# Altium PCB PCB1.PcbDoc
Units mm, origin at the board's own origin, x right, y up, seen from the top; angles counter-clockwise.
Board outline 17.85 x 10.65 mm, 2 copper layers (Top Layer, Bottom Layer); 9 components, 5 nets, 19 pads, 0 vias.
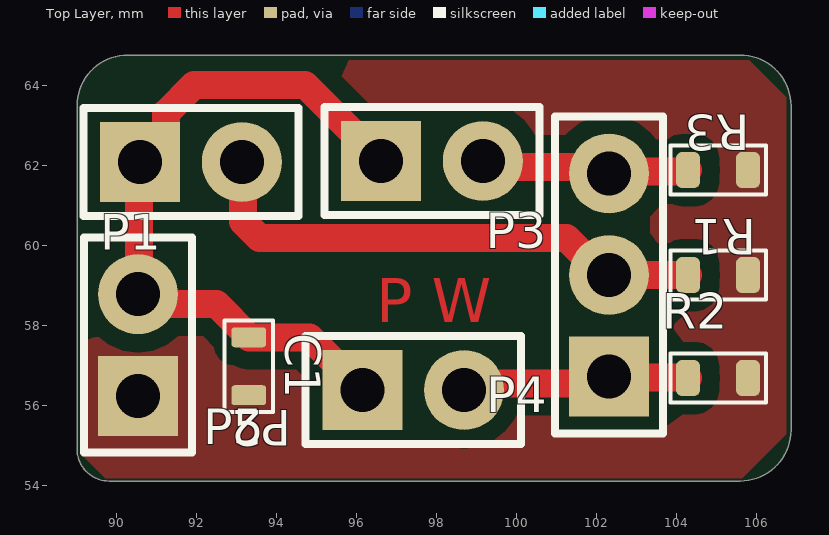
[diagram p0: Top Layer view]
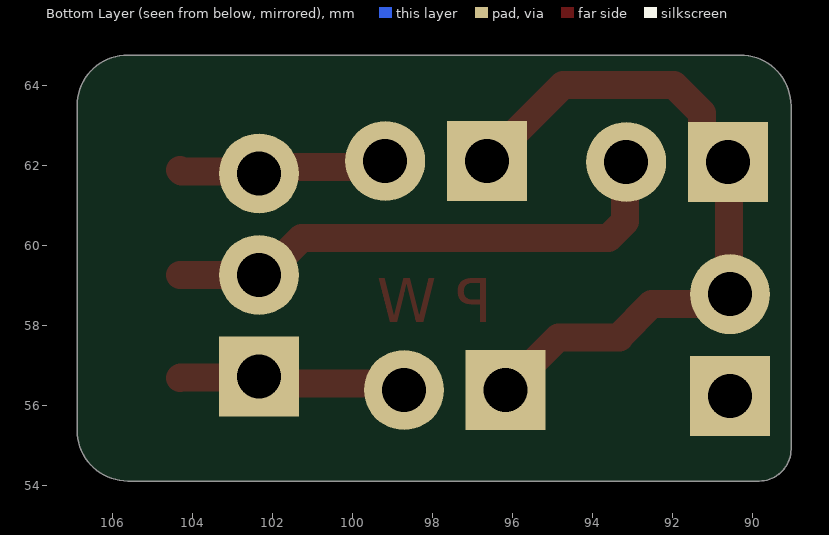
[diagram p1: Bottom Layer view, seen from below]
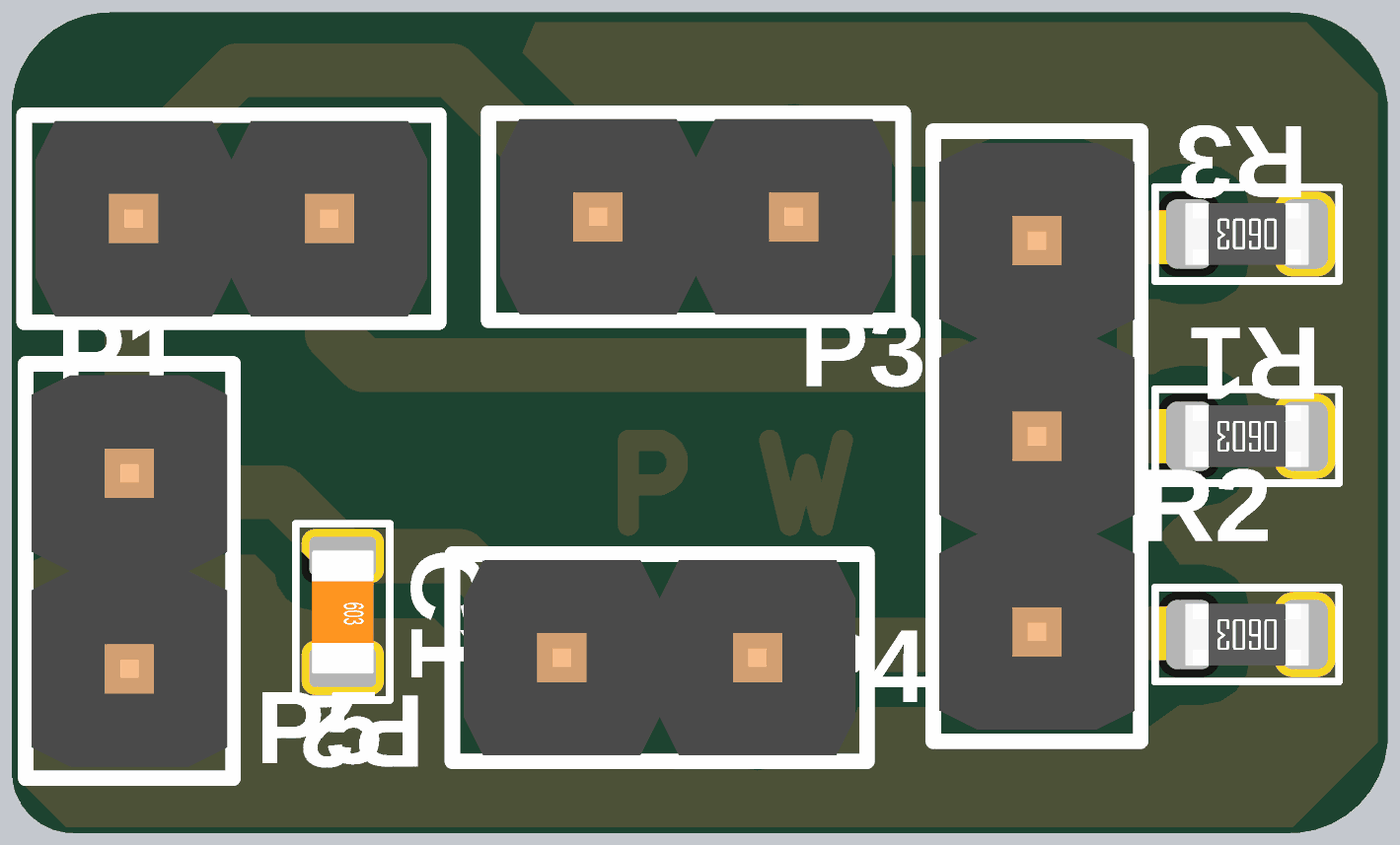
[diagram p2: 3D render of the assembled board from above, using the file's embedded part models]

## Layer stack, top to bottom
Top Solder: solder mask 0.0102, Solder Resist, Dk 3.5
Top Layer: signal copper 0.0356
Dielectric 1: dielectric 0.32, FR-4, Dk 4.8
Bottom Layer: signal copper 0.0356
Bottom Solder: solder mask 0.0102, Solder Resist, Dk 3.5

## Board outline
89.025,54.9 ccw(c89.825,54.9) 89.825,54.1 105.605,54.1 ccw(c105.605,55.37) 106.875,55.37 106.875,63.48 ccw(c105.605,63.48) 105.605,64.75 90.295,64.75 ccw(c90.295,63.48) 89.025,63.48

## Design rules (kind name [scope] priority, off if disabled: settings)
Clearance [All] p1: gap=0.45 ignorepadtopadclearanceinfootprint=FALSE
PlaneConnect [All] p1: planeconnectstyle=Direct reliefexpansion=0.508 reliefentries=4 reliefconductorwidth=0.254 reliefairgap=0.254
PolygonConnect [All] p1: connectstyle=Direct reliefconductorwidth=0.254 reliefentries=4 polygonreliefangle="90 Angle" airgapwidth=0.254
RoutingVias [All] p1: holewidth=0.711 width=1.27 viastyle="Through Hole" minholewidth=0.711 minwidth=1.27 maxholewidth=0.711 maxwidth=1.27
SolderMaskExpansion [All] p1: expansion=0.102 istentingtop=FALSE
Width [All] p1: maxlimit=2 minlimit=0.45 preferedwidth=1
29 further rules are at their usual default settings.

## Components (designator, comment, footprint, x,y, rotation, side; value= is the part's Value field where it differs from the comment)
C1 "" C_0603 93.318,56.969 r270 top
P1 "61300211121" 61300211121 91.875,62.075 r0 top
P2 "61300211121" 61300211121 97.43,56.375 r0 top
P3 "61300211121" 61300211121 97.9,62.1 r0 top
P4 "61300311121" 61300311121 102.325,59.25 r90 top
P5 "61300211121" 61300211121 90.55,57.5 r90 top
R1 "1kΩ" R_0603 105.05,59.25 r180 top
R2 "1kΩ" R_0603 105.05,56.675 r180 top
R3 "1kΩ" R_0603 105.05,61.875 r180 top

## Footprints (in the part's own frame and the unit in brackets; to place one, negate y for a bottom-side part, rotate by r counter-clockwise, add the part's x,y. Pads: shape width x height; smd on the part's side, far side on the other; paste and mask are expansions set on the pad)
61300211121 [mm] "Pin Header, pitch 2.54 mm, THT, Vertical, single row, 2p"
  rect 2x2 hole 1.1: 1(-1.27,0)
  round 2 hole 1.1: 2(1.27,0)
  silkscreen extent -2.69,-1.35 2.69,1.35, body extent -2.54,-1.27 2.54,1.27, height 8.57
61300311121 [mm] "Pin Header, pitch 2.54 mm, THT, Vertical, single row, 3p"
  rect 2x2 hole 1.1: 1(-2.54,0)
  round 2 hole 1.1: 2(0,0) 3(2.54,0)
  silkscreen extent -3.96,-1.35 3.96,1.35, body extent -3.81,-1.27 3.81,1.27, height 8.57
C_0603 [mm] "Chip Capacitor; Body 1.6 x 0.8 mm (LxW typ)"
  rrect30% 0.5x0.864 smd: 1(-0.725,0) 2(0.725,0)
  silkscreen extent -1.14,-0.61 1.14,0.61, body extent -0.8,-0.4 0.8,0.4, height 0.29
R_0603 [mm]
  rrect50% 0.6x0.9 smd: 1(-0.75,0) 2(0.75,0)
  silkscreen extent -1.19,-0.61 1.19,0.61, body extent -0.8,-0.4 0.8,0.4, height 0.45

## Part data
C1: library part Capacitor_0603, "MLCC - SMD/SMT Capacitor 50V", Package=0603, Voltage=50V, Price=None
P1 P2 P3 P5: "WR-PHD Pin Header, THT, pitch 2.54mm, Single Row, Vertical, 2p", Contact Resistance=20mOhm, Manufacturer="Wurth Elektronik", Operating Temperature="-40 to +105degC", Rated Current=3A, Withstanding Voltage=500VAC, Working Voltage=250VAC, ComponentLink1Description=Manufacturer, ComponentLink1URL=http://www.we-online.de, ComponentLink2Description=Datasheet, ComponentLink2URL=https://www.we-online.com/catalog/datasheet/61300211121.pdf, Gender="Pin Header", Manufacturer Part Number=61300211121, Mounting Technology=THT, Orientation=Vertical, Packaging=Bag, Pin Number=2, Pitch=2.54mm, Published Date="May 2020", Row Number=Single
P4: "WR-PHD Pin Header, THT, pitch 2.54mm, Single Row, Vertical, 3p", Contact Resistance=20mOhm, Manufacturer="Wurth Elektronik", Operating Temperature="-40 to +105degC", Rated Current=3A, Withstanding Voltage=500VAC, Working Voltage=250VAC, ComponentLink1Description=Manufacturer, ComponentLink1URL=http://www.we-online.de, ComponentLink2Description=Datasheet, ComponentLink2URL=https://www.we-online.com/catalog/datasheet/61300311121.pdf, Gender="Pin Header", Manufacturer Part Number=61300311121, Mounting Technology=THT, Orientation=Vertical, Packaging=Bag, Pin Number=3, Pitch=2.54mm, Published Date="May 2020", Row Number=Single
R1 R2 R3: library part Resistor_0603, "SMT Resistor"

## Nets (pads, with @x,y where several pads share a name; then routed paths per layer and width w, separated by ;. In a path a pad name is that pad's centre, name@x,y a point inside that pad or via, vN(x,y) a via of type N, cw(c..) or ccw(c..) an arc to the next point about the centre after c; other vN are vias at no path point)
ADC1: P1.2 P4.2 R1.2 | length 13.2
  Top Layer w0.7: P1.2 93.175,62.045 93.175,60.585 93.585,60.175 101.265,60.175 102.19,59.25 R1.2
ADC2: P2.2 P4.1 R2.2 | length 5.8
  Top Layer w0.7: P2.2 98.868,56.543 102.157,56.543 P4.1 102.342,56.693 104.282,56.693 R2.2
ADC3: P3.2 P4.3 R3.2 | length 5.3
  Top Layer w0.7: P3.2 99.325,61.945 102.17,61.945 P4.3 102.367,61.833 104.258,61.833 R3.2
GND: C1.2 P5.1 R1.1 R2.1 R3.1
VCC: C1.1 P1.1 P2.1 P3.1 P5.2 | length 17.9
  Top Layer w0.7: P2.1 94.841,57.694 C1.1 93.318,57.712 92.509,58.521 90.799,58.521 P5.2 90.577,58.797 90.577,62.048 P1.1 91.255,62.725 91.255,63.305 91.95,64 94.73,64 P3.1

## Polygon pours and split planes (outlines as drawn)
GND on Top Layer "GND_L01_P000" (solid, remove dead copper, pour order 0): 105.475,54.175 105.65,54.175 106.75,55.275 106.75,63.7 105.825,64.625 90.125,64.625 89.15,63.65 89.15,63.475 89.15,55.625 89.15,54.75 89.725,54.175 90.6,54.175

## Other copper
Top Layer:
  text "P W" at 96.5,58.075 h1.1

## Silkscreen, mask and mechanical layers (free items; w line width, h text height)
Mechanical 1:
  lines w0.254: 89.025,54.9 ccw(c89.825,54.9) 89.825,54.1 105.605,54.1 ccw(c105.605,55.37) 106.875,55.37 106.875,63.48 ccw(c105.605,63.48) 105.605,64.75 93.25,64.75 90.295,64.75 ccw(c90.295,63.48) 89.025,63.48 89.025,54.9